# Altium PCB JacdacMotionDetection 54.PcbDoc
Units mm, origin at the board's own origin, x right, y up, seen from the top; angles counter-clockwise.
Board outline 19.46 x 23.8 mm, 2 copper layers (Top Layer, Bottom Layer), stack 1.525 mm thick; 22 components, 9 nets, 67 pads, 11 vias.
Unrouted connection lines stored in the file: 10.
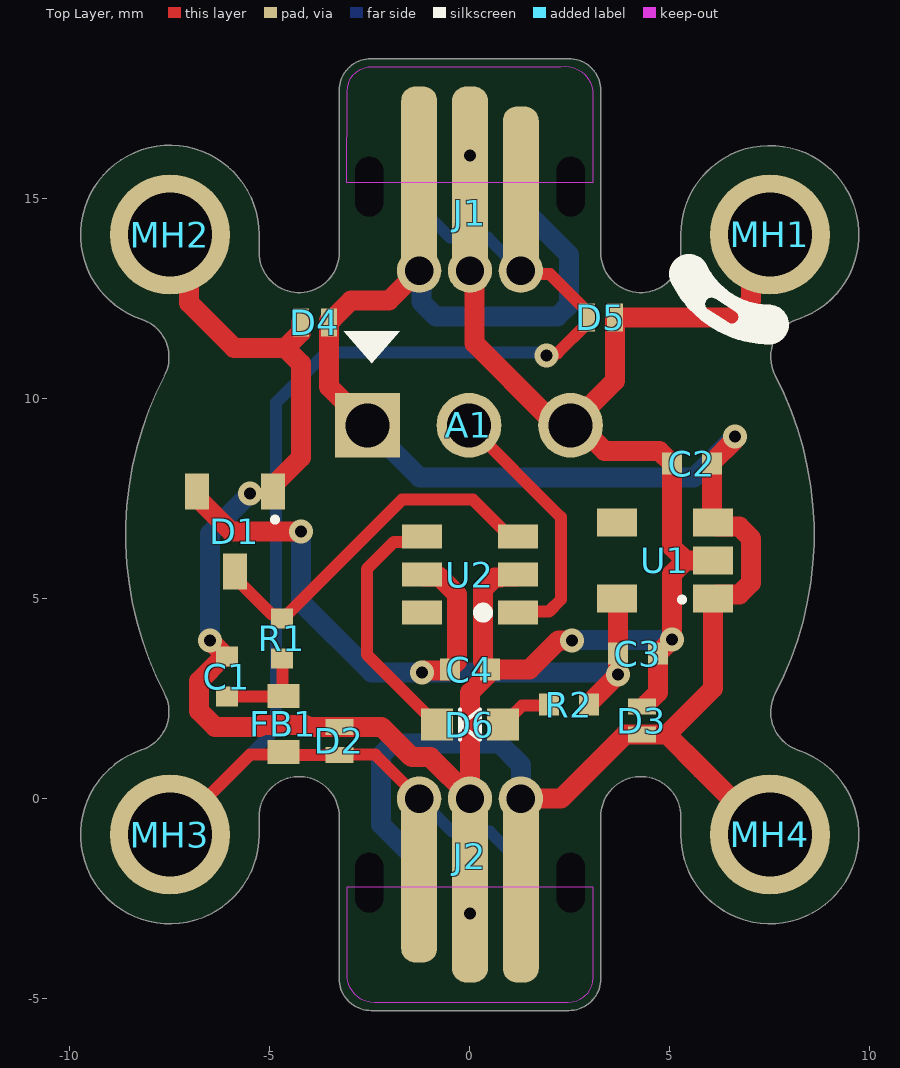
[diagram p0: Top Layer view]
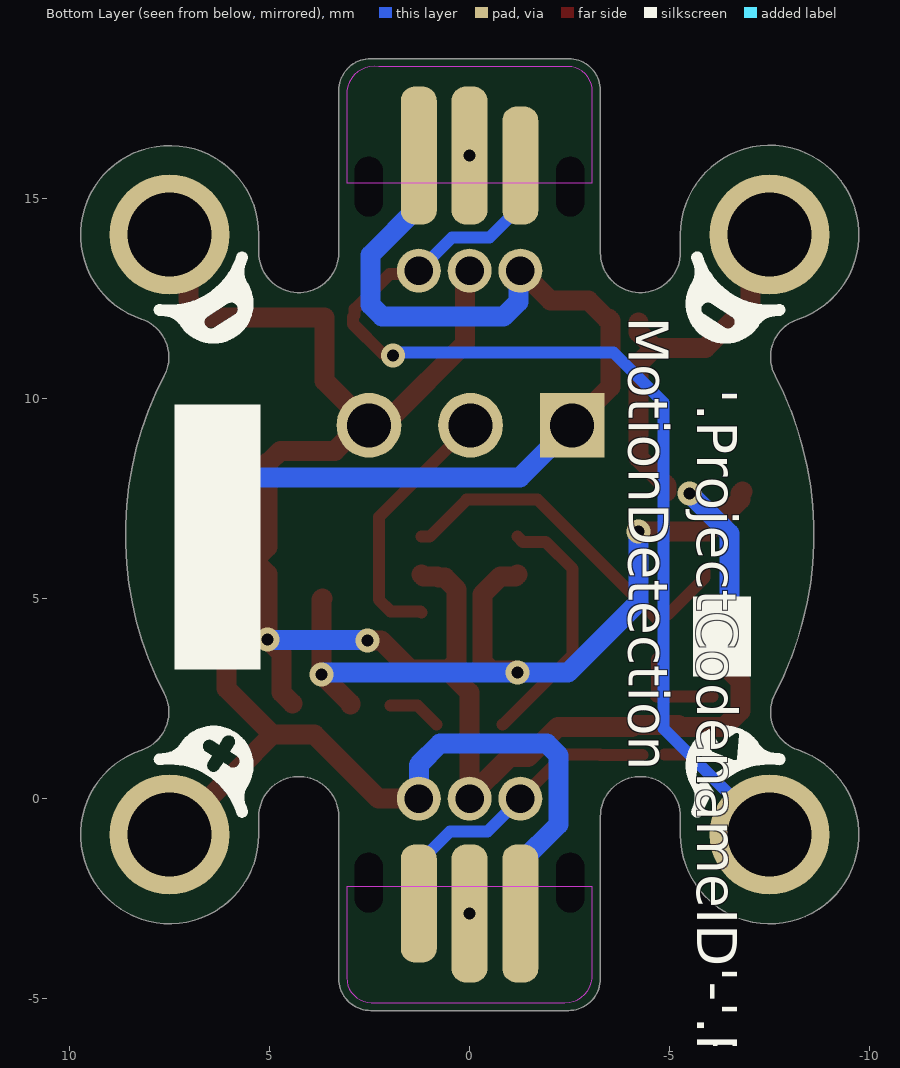
[diagram p1: Bottom Layer view, seen from below]
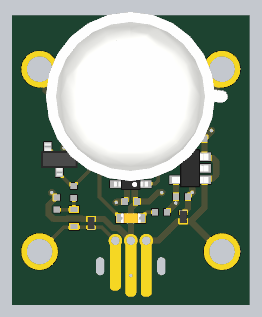
[diagram p2: 3D render of the assembled board from above, using the file's embedded part models]

## Layer stack, top to bottom
Top Solder: solder mask 0.0102, Solder Resist, Dk 3.5
Top Layer: signal copper 0.0356
Dielectric 1: core 1.454, FR-4, Dk 4.2
Bottom Layer: signal copper 0.0356
Bottom Solder: solder mask 0.0102, Solder Resist, Dk 3.5

## Board outline
-8.209,1.218 ccw(c-7.503,-0.9) -5.27,-0.9 -5.27,-0.45 cw(c-4.27,-0.45) -3.27,-0.45 -3.27,-4.5 ccw(c-2.471,-4.501) -2.47,-5.3 2.47,-5.3 ccw(c2.471,-4.501) 3.27,-4.5 3.27,-0.45 cw(c4.27,-0.45) 5.27,-0.45 5.27,-0.9 ccw(c7.497,-0.9) 8.201,1.213 cw(c8.517,2.162) 7.63,2.624 ccw(c-0.003,6.6) 7.63,10.576 cw(c8.517,11.038) 8.201,11.987 ccw(c7.497,14.1) 5.27,14.1 5.27,13.65 cw(c4.27,13.65) 3.27,13.65 3.27,17.7 ccw(c2.471,17.701) 2.47,18.5 -2.47,18.5 ccw(c-2.471,17.701) -3.27,17.7 -3.27,13.65 cw(c-4.27,13.65) -5.27,13.65 -5.27,14.1 ccw(c-7.503,14.1) -8.209,11.982 cw(c-8.525,11.033) -7.638,10.572 ccw(c-0.003,6.6) -7.638,2.628 cw(c-8.525,2.167)

## Design rules (kind name [scope] priority, off if disabled: settings)
AssemblyTestPointUsage [All] p1: valid=2
BoardOutlineClearance [All] p1: gap=0.3 ignorepadtopadclearanceinfootprint=FALSE except(0: Arc-SplitContinuation Track-SplitContinuation SMDPad-SplitContinuation THPad-SplitContinuation Via-SplitContinuation Fill-SplitContinuation Poly-SplitContinuation Region-OutlineEdge Region-SplitContinuation Text-OutlineEdge Text-SplitContinuation; 0.2: Track-OutlineEdge Fill-CavityEdge Fill-CutoutEdge Fill-SplitBarrior Poly-CavityEdge Poly-CutoutEdge Poly-SplitBarrior Text-CavityEdge Text-CutoutEdge Text-SplitBarrior; 0.25: SMDPad-OutlineEdge)
Clearance [All] p1: gap=0.125 ignorepadtopadclearanceinfootprint=FALSE except(0: Arc-Hole Track-Hole SMDPad-Hole THPad-Hole Via-Hole Fill-Hole Poly-Hole Region-Hole Text-Hole)
ComponentClearance [All] p1: gap=0.1 collisioncheckmode=3 verticalgap=0.254 showdistances=FALSE
DiffPairsRouting [All] p1: maxlimit=2 minlimit=0.15 mostfreqgap=0.15 toplayer_minwidth=0.15 toplayer_maxwidth=2 toplayer_prefwidth=0.15 bottomlayer_minwidth=0.15 bottomlayer_maxwidth=2 bottomlayer_prefwidth=0.15 substack1={CB9D278B-8BF5-444A-AAF4-837A2A9DF42D} toplayer_{cb9d278b-8bf5-444a-aaf4-837a2a9df42d}_minwidth=0.381 toplayer_{cb9d278b-8bf5-444a-aaf4-837a2a9df42d}_maxwidth=0.381 toplayer_{cb9d278b-8bf5-444a-aaf4-837a2a9df42d}_prefwidth=0.381 bottomlayer_{cb9d278b-8bf5-444a-aaf4-837a2a9df42d}_minwidth=0.381 bottomlayer_{cb9d278b-8bf5-444a-aaf4-837a2a9df42d}_maxwidth=0.381 bottomlayer_{cb9d278b-8bf5-444a-aaf4-837a2a9df42d}_prefwidth=0.381 substack2={826B8647-A721-4255-895A-19F9591B9CD1} toplayer_{826b8647-a721-4255-895a-19f9591b9cd1}_minwidth=0.381 toplayer_{826b8647-a721-4255-895a-19f9591b9cd1}_maxwidth=0.381 toplayer_{826b8647-a721-4255-895a-19f9591b9cd1}_prefwidth=0.381 bottomlayer_{826b8647-a721-4255-895a-19f9591b9cd1}_minwidth=0.381 bottomlayer_{826b8647-a721-4255-895a-19f9591b9cd1}_maxwidth=0.381 bottomlayer_{826b8647-a721-4255-895a-19f9591b9cd1}_prefwidth=0.381 substack3={E64FCAF4-1BC8-437D-B1E0-0E5F2DC0F59E} toplayer_{e64fcaf4-1bc8-437d-b1e0-0e5f2dc0f59e}_minwidth=0.381 toplayer_{e64fcaf4-1bc8-437d-b1e0-0e5f2dc0f59e}_maxwidth=0.381 toplayer_{e64fcaf4-1bc8-437d-b1e0-0e5f2dc0f59e}_prefwidth=0.381 bottomlayer_{e64fcaf4-1bc8-437d-b1e0-0e5f2dc0f59e}_minwidth=0.381 bottomlayer_{e64fcaf4-1bc8-437d-b1e0-0e5f2dc0f59e}_maxwidth=0.381 bottomlayer_{e64fcaf4-1bc8-437d-b1e0-0e5f2dc0f59e}_prefwidth=0.381 substack4={E61CE66C-507C-4E1E-8E83-C905434AFC1C} toplayer_{e61ce66c-507c-4e1e-8e83-c905434afc1c}_minwidth=0.381 toplayer_{e61ce66c-507c-4e1e-8e83-c905434afc1c}_maxwidth=0.381 toplayer_{e61ce66c-507c-4e1e-8e83-c905434afc1c}_prefwidth=0.381 bottomlayer_{e61ce66c-507c-4e1e-8e83-c905434afc1c}_minwidth=0.381 bottomlayer_{e61ce66c-507c-4e1e-8e83-c905434afc1c}_maxwidth=0.381 bottomlayer_{e61ce66c-507c-4e1e-8e83-c905434afc1c}_prefwidth=0.381 maxuncoupledlength=25
FabricationTestPointUsage [All] p1: valid=2 allowmultiple=FALSE
HoleSize [All] p1: absolutevalues=TRUE maxlimit=2.54 minlimit=0.2 maxpercent=80.000 minpercent=20.000
MinimumSolderMaskSliver [All] p1: minsoldermaskwidth=0.005
PlaneClearance [All] p1: clearance=0.3
PlaneConnect [All] p1: planeconnectstyle=Relief reliefexpansion=0.5 reliefentries=4 reliefconductorwidth=0.2 reliefairgap=0.3
PolygonConnect "PolygonConnect GND" [isVIA] p1: connectstyle=Relief reliefconductorwidth=0.2 reliefentries=4 polygonreliefangle="90 Angle" airgapwidth=0.2
PolygonConnect [All] p2: connectstyle=Relief reliefconductorwidth=0.2 reliefentries=4 polygonreliefangle="90 Angle" airgapwidth=0.2
RoutingVias [All] p1: holewidth=0.3 width=0.6 viastyle="Through Hole" minholewidth=0.3 minwidth=0.6 maxholewidth=0.5 maxwidth=0.8
SilkToSilkClearance [All] p1: silktosilkclearance=0.001
SilkToSolderMaskClearance [IsPad] p1: minsilkscreentomaskgap=0.05 clearancetoexposedcopper=TRUE
SolderMaskExpansion [All] p1: expansion=0.075 istentingtop=FALSE
Width [All] p1: maxlimit=2 minlimit=0.15 preferedwidth=0.15 substack1={CB9D278B-8BF5-444A-AAF4-837A2A9DF42D} substack2={826B8647-A721-4255-895A-19F9591B9CD1} substack3={E64FCAF4-1BC8-437D-B1E0-0E5F2DC0F59E} substack4={E61CE66C-507C-4E1E-8E83-C905434AFC1C} minimp=50.000000 maximp=50.000000 favimp=50.000000
20 further rules are at their usual default settings.

## Components (designator, comment, footprint, x,y, rotation, side; value= is the part's Value field where it differs from the comment)
A1 "AM312" AM312 -0.025,9.333 r90 top locked
C1 "CL05C330JB5NNNC" "C0402_0.55MM - without outline" -6.075,3.05 r270 top
C2 "CL05A105KP5NNNC" "C0402_0.55MM - without outline" 5.55,8.375 r0 top
C3 "CL05A105KP5NNNC" "C0402_0.55MM - without outline" 4.2,3.625 r180 top
C4 "CL05A105KP5NNNC" "C0402_0.55MM - without outline" 0,3.225 r180 top
D1 "BAT54S" "NXP-BAT54S-TO-236AB - WITHOUT OUTLINE" -5.875,6.675 r270 top
D2 "RCLAMP0521P-N" "TVS 0402 - L" -3.266,1.443 r90 top
D3 "RCLAMP0521P-N" "TVS 0402 - L" 4.3,1.95 r90 top
D4 "RCLAMP0521P-N" "TVS 0402 - L" -3.875,11.9 r180 top
D5 "RCLAMP0521P-N" "TVS 0402 - L" 3.275,12.025 r0 top
D6 "Everlight Elec'''" "0603 Orange - without outline" 0,1.85 r0 top
FB1 "TDK MPZ1608S102ATA00" "TDK MPZ1608 0.8mm - without outline" -4.664,1.861 r90 top
J1 "3 pin JACDAC edge connector" JACDAC_EDGE_CONNECTOR_NO_TRACES 0,12.65 r0 top
J2 "3 pin JACDAC edge connector" JACDAC_EDGE_CONNECTOR_NO_TRACES 0,0.55 r180 top
MH1 "MH_5.0MMK_3.0MMC_2.1MMD_PTH" MH_5.0MMK_3.0MMC_2.1MMD_PTH 7.5,14.1 r0 top
MH2 "MH_5.0MMK_3.0MMC_2.1MMD_PTH" MH_5.0MMK_3.0MMC_2.1MMD_PTH -7.5,14.1 r180 top
MH3 "MH_5.0MMK_3.0MMC_2.1MMD_PTH" MH_5.0MMK_3.0MMC_2.1MMD_PTH -7.5,-0.9 r180 top
MH4 "MH_5.0MMK_3.0MMC_2.1MMD_PTH" MH_5.0MMK_3.0MMC_2.1MMD_PTH 7.5,-0.9 r0 top
R1 "RC0402FR-07220RL" "R0402 - Without outline" -4.7,4 r270 top
R2 "RC0402FR-071KL" "R0402 - Without outline" 2.475,2.35 r0 top
U1 "LDO 3.3V/300 mA" "ON_SEMI-SOT23-5 - WITHOUT OUTLINE" 4.875,5.95 r180 top
U2 "PMS150C" SOT23-6 0,5.6 r180 top

## Footprints (in the part's own frame and the unit in brackets; to place one, negate y for a bottom-side part, rotate by r counter-clockwise, add the part's x,y. Pads: shape width x height; smd on the part's side, far side on the other; paste and mask are expansions set on the pad)
"0603 Orange - without outline" [mm]
  rect 0.8x0.8 smd paste-0.05: 1(-0.825,0) 2(0.825,0)
  silkscreen extent -0.25,-0.38 0.25,0.38, body extent -0.8,-0.4 0.8,0.4, height 0.54
AM312 [mm] "Mini Pyroelectric PIR Sensor Module Manual Motion Infrared IR Detector"
  rect 1.62x1.62 hole 1.1: 1(0,2.54)
  round 1.62 hole 1.1: 2(0,0) 3(0,-2.54)
  silkscreen extent 1.55,1.73 2.35,3.13, body extent -4.42,-6.95 9.48,6.95, height 21.61
"C0402_0.55MM - without outline" [mm]
  rect 0.5x0.55 smd: 1(-0.5,0) 2(0.5,0)
  body extent -0.5,-0.25 0.5,0.25, height 0.55
JACDAC_EDGE_CONNECTOR_NO_TRACES [mm] "JacDac 3 pin connector with no traces"
  rrect78% 0.9x2.95 smd far side paste-1 mask+0: 1(-1.27,3.175)
  round 1.11 / inner round 0.71 / far side round 1.1 hole 0.71 paste-0.254 mask+0: 1(1.27,0.55) 2(0,0.55) 3(-1.27,0.55)
  rrect78% 0.9x4.3 smd paste-1 mask+0: 1(1.27,2.5)
  rrect78% 0.9x4.8 smd paste-1 mask+0: 2(0,2.75) 3(-1.27,2.75)
  rrect78% 0.9x3.45 smd far side paste-1 mask+0: 2(0,3.425) 3(1.27,3.425)
  round 0 hole 0.7 slot 1.5 at 90 deg unplated: ""(-2.52,2.65) ""(2.52,2.65)
  Top Layer keep-out region: -3.075,2.75 -3.07,5.033 -2.987,5.341 -2.761,5.567 -2.453,5.65 -2.453,5.65 2.27,5.65 2.545,5.635 2.794,5.516 2.978,5.31 3.07,5.05 3.07,5.05 3.07,2.75
  Bottom Layer lines w0.2: -1.27,0.85 -1.126,0.85
  Bottom Layer keep-out region: -3.07,2.75 -3.07,5.033 -3.023,5.269 -2.889,5.469 -2.689,5.603 -2.453,5.65 -2.453,5.65 2.27,5.65 2.545,5.635 2.794,5.516 2.978,5.31 3.07,5.05 3.07,5.05 3.07,2.75
MH_5.0MMK_3.0MMC_2.1MMD_PTH [mm] "Mounting Hole 5.0mm clearance, 3.1 annualar ring and 2.1mm PTH"
  round 3 hole 2.1 mask+0.05: 1(0,0)
"NXP-BAT54S-TO-236AB - WITHOUT OUTLINE" [mm] "SOT23, 3-Leads, Body 2.90x2.30mm, Pitch 0.95mm, IPC Medium Density"
  rect 0.9x0.6 smd: 1(-1,0.95) 2(-1,-0.95) 3(1,0)
  silkscreen extent -0.35,0.95 -0.25,1.05, body extent -1.32,-1.5 1.32,1.5, height 1.12
"ON_SEMI-SOT23-5 - WITHOUT OUTLINE" [mm]
  rect 1x0.7 smd: 1(-1.2,0.95) 2(-1.2,0) 3(-1.2,-0.95) 4(1.2,-0.95) 5(1.2,0.95)
  silkscreen extent -0.48,0.93 -0.38,1.02, body extent -1.5,-1.57 1.5,1.58, height 1.1
"R0402 - Without outline" [mm]
  rect 0.5x0.55 smd: 1(-0.5,0) 2(0.5,0)
  body extent -0.5,-0.25 0.5,0.25, height 0.35
SOT23-6 [mm] "SOT23, 6-Leads, Body 2.90x2.45mm, Pitch 0.95mm, IPC Medium Density"
  rect 1x0.6 smd: 1(-1.2,0.95) 2(-1.2,0) 3(-1.2,-0.95) 4(1.2,-0.95) 5(1.2,0) 6(1.2,0.95)
  silkscreen extent -0.43,0.85 -0.23,1.05, body extent -1.4,-1.45 1.4,1.45, height 1.45
"TDK MPZ1608 0.8mm - without outline" [mm]
  rect 0.6x0.8 smd paste-0.1: 1(-0.7,0) 2(0.7,0)
  body extent -0.8,-0.4 0.8,0.4, height 0.8
"TVS 0402 - L" [mm] "TVS 0402 RoHS"
  rect 0.4x0.7 smd paste-0.038 mask+0.05: 1(-0.35,0) 2(0.35,0)
  body extent -0.5,-0.3 0.5,0.3, height 0.5

## Part data
A1: "Low Power Ultra-Miniature PIR Sensor", Case/Package=Module, Max Operating Temperature=60°C, Min Operating Temperature=-20°C, Supplier Part Number 1=1528-1991-ND, ComponentLink1Description="Online datasheet", ComponentLink1URL=http://www.image.micros.com.pl/_dane_techniczne_auto/cz%20am312.pdf, Descr="PIR (MOTION) SENSOR", Manufacturer Part Number=AM312, Output Type=Digital, Pricing 2="1=9.95000, 10=9.95000, 50=9.95000, 100=9.95000, 1000=9.95000, 10000=9.95000 (USD)", Pricing 3="1=11.13000 (USD)", Pricing 4="1=9.95000 (USD)", Rays Vector=IR, Sensing Method="Infrared (IR)", Stock 2=117, Stock 3=85, Stock 4=1, Supplier 2=Mouser, Supplier 3="Arrow Electronics", Supplier 4="Allied Electronics", Supplier Part Number 2=485-189, Supplier Part Number 3=189, Supplier Part Number 4=70928194
C1: "CAP CER 33PF 50V C0G/NP0 0402", Capacitance=33pF, Case Code (Imperial)=0402, Case Code (Metric)=1005, Dielectric=C0G, Manufacturer=Samsung, Max Operating Temperature=125°C, Min Operating Temperature=-55°C, Package Quantity=1, Supplier Part Number 1=1276-1272-1-ND, Temperature Coefficient=300ppm/°C, Tolerance=5%, Voltage=50V, Case/Package=0402, Category="Ceramic Capacitors", ComponentLink1Description="Online datasheet", ComponentLink1URL=https://datasheet.ciiva.com/15195/getdatasheetpartid-355282-15195687.pdf, Construction=Flat, Contact Plating=Tin, Depth=0.5mm, Height=0.5mm, Lead Free="Lead Free", Length=1mm, Manufacturer Part Number=CL05C330JB5NNNC, Material=Ceramic, Mount="Surface Mount", Packaging="Tape and Reel", Pricing 1="1=0.10000, 10=0.02300, 50=0.01260, 100=0.01040, 500=0.00740, 1000=0.00582, 2500=0.00529, 5000=0.00487 (USD)", Pricing 2="1=0.12500, 25=0.02900, 100=0.01300, 250=0.01100, 500=0.00900, 1000=0.00600 (USD)", Pricing 3="1=0.10000, 10=0.01400, 50=0.01400, 100=0.01100, 1000=0.00600, 10000=0.00400 (USD)", Pricing 4="150=0.01120, 500=0.00860, 2500=0.00640, 5000=0.00550 (GBP)", Radiation Hardening=No, RoHS=Yes, RoHS Compliant=Yes, Series=CL, Stock 1=5436088, Stock 2=45340, Stock 3=8877, Stock 4=10934, Supplier 1=Digi-Key, Supplier 2=Newark, Supplier 3=Mouser, Supplier 4=Farnell, Supplier Part Number 2=82AC9259, Supplier Part Number 3=187-CL05C330JB5NNNC, Supplier Part Number 4=3013373RL, Thickness=0.022inch, Voltage Rating=50V, Voltage Rating (DC)=50V, Width=0.02inch
C2 C3 C4: "CAP CER 1UF 10V X5R 0402", Capacitance=1µF, Case Code (Imperial)=0402, Case Code (Metric)=1005, Dielectric=X5R, Manufacturer=Samsung, Max Operating Temperature=85°C, Min Operating Temperature=-55°C, Package Quantity=1, Supplier Part Number 1=1276-1076-1-ND, Tolerance=10%, Voltage Rating=10V, Case/Package=0402, Category=Capacitors, Checked=?, ComponentLink1Description="Online datasheet", ComponentLink1URL=https://datasheet.ciiva.com/15195/getdatasheetpartid-358390-15195630.pdf, Contact Plating=Tin, Created=DG, Depth=0.5mm, Height=0.5mm, Length=1mm, Manufacturer Part Number=CL05A105KP5NNNC, Material=Ceramic, Mount="Surface Mount", Packaging="Tape and Reel", Pricing 1="1=0.10000, 10=0.03900, 50=0.02100, 100=0.01720, 500=0.01228, 1000=0.00965, 2500=0.00877, 5000=0.00807 (USD)", Pricing 2="1=0.10000, 10=0.04200, 100=0.01800, 500=0.01300, 1000=0.01000, 2500=0.00900 (USD)", Pricing 3="10=0.02450, 100=0.02000, 500=0.01310, 2500=0.00920, 5000=0.00810, 10000=0.00640, 50000=0.00490 (GBP)", Radiation Hardening=No, RoHS=Yes, Stock 1=5705569, Stock 2=928941, Stock 3=53670, Supplier 1=Digi-Key, Supplier 2=Mouser, Supplier 3=Farnell, Supplier Part Number 2=187-CL05A105KP5NNNC, Supplier Part Number 3=3013329, Thickness=0.022inch, Width=0.02inch
D1: "DIODE ARRAY SCHOTTKY 30V SOT23", Manufacturer=Nexperia, Manufacturer Part Number=BAT54S,235, Supplier Part Number 1=1727-1868-1-ND, Category="Rectifier Diodes", ComponentLink1Description="NXP datasheet online", ComponentLink1URL=https://assets.nexperia.com/documents/data-sheet/BAT54_SER.pdf, Pricing 1="1=0.13000, 10=0.11900, 100=0.05610, 500=0.03326, 1000=0.02185, 5000=0.02138 (USD)", RoHS=No, Stock 1=14011, Supplier 1=Digi-Key, Supplier 2=Mouser, Supplier 3=RSComponents, Supplier Part Number 2=771-BAT54S235, Supplier Part Number 3=1707990
D2 D3 D4 D5: "Bidirectional 5V (Max) 6V 16V 3.5A (8/20us) 0402 TVS RoHS", Manufacturer="Born Semiconductor", Package=0402, Supplier1 Part Number=C316043, Checked By=?, ComponentLink1Description="Online datasheet", ComponentLink1URL=https://datasheet.lcsc.com/szlcsc/Bourne-Semicon-Shenzhen-RCLAMP0521P-N_C316043.pdf, Created By="D Gakure", Manufacturer Part Number=RCLAMP0521P-N, Supplier1=LCSC
D6: library part 19-217/S2C-AQ1R1B/3T, "LED ORANGE DIFFUSED 1608 SMD", Case Code (Imperial)=0603, Case Code (Metric)=1608, Color=Orange, Forward Voltage=2.05V, Lens Color=White, Manufacturer="Everlight Elec", Supplier 1 Part Number=C146215, Test Current=25mA, Case/Package=0603, Category=LEDs, Colour=Orange, ComponentLink1Description="Online datasheet", ComponentLink1URL=https://datasheet.lcsc.com/lcsc/1912171731_Everlight-Elec-19-217-S2C-AQ1R1B-3T_C146215.pdf, Dominant Wavelength=605nm, Height=0.65mm, Lead Free="Lead Free", Length=1.6mm, Lens Transparency=Diffused, Luminous Intensity=100mcd, Manufacturer Part Number=19-217/S2C-AQ1R1B/3T, Mount="Surface Mount", RoHS=Yes, Supplier 1=LCSC, Width=0.8mm
FB1: "0603 1k@100MHz 0.8A chip", Case Code (Imperial)=0603, Case Code (Metric)=1608, Current Rating=800mA, DC Resistance (DCR)=300mR, Manufacturer=TDK, Manufacturer Part Number=MPZ1608S102ATA00, Package Quantity=4000, Supplier Part Number 1=445-8694-1-ND, Tolerance=25%, Case/Package=0603, ComponentLink2Description="datasheet online", ComponentLink2URL=https://www.mouser.co.uk/datasheet/2/400/eads_commercial_power_mpz1608_en-923650.pdf, ComponentLink3Description=datasheet, ComponentLink3URL="Y:\System\Altium\Libraries 2014\TDK\Datasheets\eads_commercial_power_mpz1608_en-923650.pdf", Core Material=Ferrite, Height=0.037inch, Impedance="1kR @ 100MHz", Length=0.063inch, Max DC Current=800mA, Mount="Surface Mount", Packaging="Tape and Reel", Pricing 1="1=0.1, 10=0.079, 25=0.0716, 50=0.0644, 100=0.0472, 250=0.03432, 500=0.03146, 1000=0.02717 (USD)", Stock 1=113542, Supplier 1=Digi-Key, Supplier 2=Mouser, Supplier Part Number 2=810-MPZ1608S102ATA00, Width=0.031inch
J1 J2: library part "Jacdac edge connector", "3 pin Jacdac edge connector 1.27mm pitch", Manufacturer Part Number=JACDAC_EDGE_CONNECTOR, Checked By=?, ComponentLink1Description="Yuliang JACDAC cable connector drawing online", ComponentLink1URL=https://github.com/microsoft/jacdac-mdk/blob/main/connector/JACDAC-Connector-by-Yuliang-2020-11-28.pdf, ComponentLink2Description="JACDAC PCB edge connector spec onlin", ComponentLink2URL=https://github.com/microsoft/jacdac-mdk/blob/main/connector/JACDAC_PCB_Edge_Connector_Drawing_JD-PEC-01_rev_01.pdf, Created By="D. Gakure", PCB Type="1.6mm FR4"
MH1 MH2 MH3 MH4: "Mounting Hole 5.0mm keepout, 3.0mm annualar ring and 2.1mm Drill PTH"
R1: "RES SMD 220 OHM 1% 1/16W 0402", Case Code (Imperial)=0402, Case Code (Metric)=1005, Manufacturer=Yageo, Max Operating Temperature=155°C, Max Power Dissipation=63mW, Min Operating Temperature=-55°C, Package Quantity=1, Power Rating=62.5mW, Resistance=220R, Resistor Type="Thick Film", Supplier Part Number 1=311-220LRCT-ND, Temperature Coefficient=100ppm/°C, Tolerance=1%, Voltage Rating=50V, Case/Package=0402, Category=Resistors, Checked=?, ComponentLink1Description="Online datasheet", ComponentLink1URL=https://datasheet.ciiva.com/11819/0900766b80c66297-11819466.pdf, Created=D.G, Depth=0.5mm, Features="Moisture Resistant", Height=0.016inch, Lead Free="Lead Free", Length=1mm, Manufacturer Part Number=RC0402FR-07220RL, Military Standard=Not, Number of Pins=2, Number of Terminations=2, Packaging="Tape and Reel", Pricing 1="1=0.10000, 10=0.01400, 100=0.00580, 1000=0.00262, 2500=0.00228, 5000=0.00188 (USD)", Pricing 2="1=0.10000, 10=0.01200, 100=0.00400, 1000=0.00400, 2500=0.00400, 10000=0.00300 (USD)", Pricing 3="1=0.08130, 25=0.01210, 100=0.01120, 250=0.01030, 500=0.00900 (GBP)", REACH SVHC="No SVHC", RoHS=Yes, Stock 1=1286042, Stock 2=324625, Stock 3=18234, Supplier 1=Digi-Key, Supplier 2=Mouser, Supplier 3=Farnell, Supplier Part Number 2=603-RC0402FR-07220RL, Supplier Part Number 3=2147864, Termination=SMD/SMT, Voltage Rating (DC)=50V, Width=0.02inch
R2: "RES SMD 1K OHM 1% 1/16W 0402", Case Code (Imperial)=0402, Case Code (Metric)=1005, Manufacturer=Yageo, Max Operating Temperature=155°C, Min Operating Temperature=-55°C, Power Rating=62.5mW, Resistance=1kR, Resistor Type="Thick Film", Supplier Part Number 1=311-1.00KLRDKR-ND, Temperature Coefficient=100ppm/°C, Tolerance=1%, Voltage Rating=50V, Case/Package=0402, Category=Resistors, Checked=?, ComponentLink2Description="Online datasheet", ComponentLink2URL=https://datasheet.ciiva.com/12666/pyu-rc0402-51-rohs-l-6-r-12666741.pdf, Created=D.G, Depth=0.5mm, Height=0.32mm, Lead Free="Lead Free", Length=1mm, Manufacturer Part Number=RC0402FR-071KL, Military Standard=Not, Number of Pins=2, Packaging="Tape and Reel", Pricing 1="1=0.10000, 10=0.01400, 100=0.00580, 1000=0.00262, 2500=0.00228, 5000=0.00188 (USD)", Pricing 2="1=0.10000, 10=0.01200, 100=0.00400, 1000=0.00400, 2500=0.00400, 10000=0.00300 (USD)", Pricing 3="1=0.08130, 25=0.01210, 100=0.01120, 250=0.01030, 500=0.00900 (GBP)", REACH SVHC=Unknown, RoHS=Yes, Stock 1=37591306, Stock 2=11912978, Stock 3=29900, Supplier 1=Digi-Key, Supplier 2=Mouser, Supplier 3=Farnell, Supplier Part Number 2=603-RC0402FR-071KL, Supplier Part Number 3=2132441, Termination=SMD/SMT, Voltage Rating (DC)=50V, Width=0.5mm
U1: library part NCP114ASN330T1G, "ON SEMICONDUCTOR - NCP114ASN330T1G - LDO Voltage Regulator, Fixed, 1.7 V to 5.5 V in, 3.3 V/300 mA out, 150 mV drop, TSOP-5", Case/Package=SOT-23-5, Dropout Voltage=225mV, Manufacturer="ON Semiconductor", Max Input Voltage=5.5V, Max Operating Temperature=85°C, Min Operating Temperature=-40°C, Min Output Voltage=3.3V, Output Current=300mA, Power Supply Rejection Ratio (PSRR)=75dB, Quiescent Current=95uA, Supplier Part Number 1=NCP114ASN330T1GOSCT-ND, Category="Voltage Regulators - Linear", Checked=?, ComponentLink3Description="On Semi datasheet online", ComponentLink3URL=http://www.onsemi.com/pub/Collateral/NCP114-D.PDF, Created=DG, Lead Free="Lead Free", Manufacturer Part Number=NCP114ASN330T1G, Mount="Surface Mount", Number of Regulators=1, Output Configuration=Positive, Output Type=Fixed, Packaging="Cut Tape", Pricing 1="1=0.33000, 10=0.24900, 25=0.21760, 100=0.12440, 250=0.11664, 500=0.09330, 1000=0.07153 (USD)", RoHS=No, Stock 1=32529, Supplier 1=Digi-Key, Supplier 2=RSComponents, Supplier 3=Mouser, Supplier Part Number 2=1263178, Supplier Part Number 3=863-NCP114ASN330T1G
U2: "8bit OTP Type IO Controller", Manufacturer=PADAUK, Manufacturer Part Number=PMS150C-U6, Package=SOT-23-6, Supplier Part Number 1=C168658, ComponentLink1Description="Padauk datasheet online", ComponentLink1URL=http://www.padauk.com.tw/upload/doc/PMS15A,PMS150C%20datasheet%20V108_EN_20200724.pdf, Pricing 1="1=0.6, 10=0.0595, 100=0.0449", Stock 1=0, Supplier 1=LCSC, Supplier Order Qty 1=3000

## Via types
v1: diameter 0.6, hole 0.3, Top Layer to Bottom Layer, tented both sides, 11 vias

## Nets (pads, with @x,y where several pads share a name; then routed paths per layer and width w, separated by ;. In a path a pad name is that pad's centre, name@x,y a point inside that pad or via, vN(x,y) a via of type N, cw(c..) or ccw(c..) an arc to the next point about the centre after c; other vN are vias at no path point)
3V3: C3.2 C4.2 D1.2 R2.2 U1.5 U2.5 | length 20.3
  Top Layer w0.5: D1.2 -6.775,7.625 -6.775,7.475 -5.975,6.675 v1(-4.225,6.675) ; v1(-1.2,3.15) -1.173,3.15 -1.123,3.2 -0.5,3.2 C4.2 ; U2.5 -1.15,5.55 -0.77,5.55 -0.325,5.105 -0.325,3.425 C4.2@-0.5,3.25 ; R2.2 2.975,2.375 v1(3.7,3.1) C3.2 3.7,4.975 U1.5
  Bottom Layer w0.5: v1(-4.225,6.675) -4.225,4.911 -2.464,3.15 v1(-1.2,3.15) 3.623,3.15 3.673,3.1 v1(3.7,3.1)
GND: A1.3 C1.1 C2.1 C3.1 C4.1 D1.1 D2.2 D3.2 D4.2 D5.2 J1.2 J2.2 MH1.1 MH2.1 U1.2 U2.2 | length 58.9
  Top Layer w0.5: MH2.1 -7.023,13.623 -7.023,12.395 -5.894,11.265 -4.617,11.265 ; v1(-6.5,3.95) C1.1@-6.1,3.55 ; C1.1 -6.162,3.55 -6.775,2.937 -6.775,2.195 -6.374,1.793 -5.262,1.793 -5.22,1.836 -4.109,1.836 -4.067,1.793 -2.213,1.793 -1.456,1.036 -0.991,1.036 J2.2@0,0.045 ; D1.1 -4.925,7.825 -4.875,7.875 -4.225,8.525 -4.225,10.873 -4.617,11.265 ; D4.2 -4.225,11.657 -4.617,11.265 ; J2.2@0,0 J2.2@0,0.045 ; J1.2@0,13.2 0.117,13.083 0.117,11.376 1.946,9.547 2.301,9.547 A1.3 ; U2.2 1.15,5.55 0.796,5.55 0.771,5.525 0.618,5.525 0.325,5.232 0.325,3.425 0.5,3.25 C4.1 ; v1(2.545,3.95) 2.208,3.95 1.483,3.225 C4.1 ; D3.2@4.425,2.375 4.7,2.65 C3.1 4.7,3.65 4.725,3.65 v1(5.05,3.975) 5.05,5.609 5.391,5.95 ; U1.2 5.391,5.95 ; MH1.1 7.025,13.625 7.025,12.45 6.6,12.025 D5.2 3.625,10.443 A1.3 ; J2.2@0,0.045 0,2.654 0.5,3.154 C4.1 ; A1.3 2.727,9.333 3.368,8.692 4.733,8.692 5.025,8.4 5.05,8.4 5.05,6.291 5.391,5.95
  Bottom Layer w0.5: v1(-6.5,3.95) -6.5,6.625 v1(-5.5,7.625) ; v1(2.545,3.95) 2.558,3.963 5.038,3.963 v1(5.05,3.975)
  other v1: 0,-2.875 0,16.075
JD_DATA: D2.1 D5.1 FB1.1 J1.1 J2.1 MH3.1 | length 38.2
  Top Layer w0.3: MH3.1 -5.5,1.1 FB1.1@-4.875,1.1 ; FB1.1@-4.318,1.093 D2.1 ; D2.1@-3.262,1.098 -2.368,1.098 J2.1@-1.27,0 ; J1.1@1.27,13.2 1.361,13.109 2.001,13.109 2.875,12.235 2.875,12.085 D5.1@2.915,12.045 ; v1(1.908,11.075) 1.966,11.132 2.182,11.132 2.915,11.865 D5.1@2.915,11.97
  Bottom Layer w0.3: MH3.1 -4.85,1.75 -4.85,9.9 -3.6,11.15 v1@1.908,11.15 ; J2.1@-1.27,0 -0.445,-0.825 0.495,-0.825 1.27,-1.6 J2.1@1.27,-2.625 ; J1.1@-1.27,15.825 -1.27,14.8 -0.495,14.025 0.445,14.025 J1.1@1.27,13.2
JD_DATA_MCU: D1.3 R1.1 U2.3 | length 9.3
  Top Layer w0.3: D1.3 -5.875,5.525 -4.95,4.6 -4.8,4.6 R1.1 -4.675,4.5 -1.7,7.475 0.075,7.475 1,6.55 U2.3
JD_PWR: A1.1 C2.2 D3.1 D4.1 J1.3 J2.3 MH4.1 U1.1 U1.3 | length 52.2
  Top Layer w0.5: A1.1@-2.025,9.873 -2.565,9.333 -3.525,10.293 D4.1 -3.525,11.95 -3.475,12 -3.425,12 -2.975,12.45 -2.025,12.45 -1.275,13.2 J1.3@-1.27,13.2 ; J2.3@1.27,0 2.281,0 3.881,1.6 D3.1 4.925,1.6 ; v1(6.625,9.05) 6.606,9.031 6.606,8.956 6.05,8.4 C2.2 6.05,6.925 6.175,6.8 6.732,6.8 7.025,6.507 7.025,5.393 6.732,5.1 6.175,5.1 U1.1 6.075,2.75 4.925,1.6 ; MH4.1@7.425,-0.9 5.792,0.733 4.925,1.6
  Bottom Layer w0.5: A1.1@-2.565,9.333 -1.257,8.025 5.6,8.025 v1(6.625,9.05) ; J2.3@-1.27,-2.875 -1.27,-1.6 -2.225,-0.645 -2.225,1.082 -1.932,1.375 0.738,1.375 1.27,0.843 J2.3@1.27,0 ; J1.3@-1.27,13.2 -1.218,13.148 -1.218,12.414 -0.854,12.05 2.185,12.05 2.478,12.343 2.478,13.592 1.27,14.8 J1.3@1.27,16.075
JD_STATUS: D6.1 U2.4 | length 6.3
  Top Layer w0.3: U2.4 -1.334,6.416 -1.903,6.416 -2.575,5.744 -2.575,3.6 D6.1
NetC1_2: C1.2 FB1.2 R1.2 | length 2.4
  Top Layer w0.3: C1.2 -6.07,2.555 -4.67,2.555 FB1.2 -4.682,2.578 -4.682,3.482 R1.2
NetD6_2: D6.2 R2.1 | length 1.3
  Top Layer w0.3: D6.2 1.3,2.325 R2.1@1.975,2.325
PIR_MOTION: A1.2 U2.1 | length 6.5
  Top Layer w0.3: A1.2 2.27,7.038 2.27,4.974 1.974,4.679 1.229,4.679 U2.1
pads on no net: J1. J2. U1.4 U2.6

## Other copper
Top Layer:
Bottom Layer:

## Silkscreen, mask and mechanical layers (free items; w line width, h text height)
Top Overlay:
  region: 187 vertices and 1 holes, not listed, extent 4.982,11.357 7.968,13.613
Bottom Overlay:
  drawing of 6 lines, arcs and shapes, not listed
  text "MotionDetection" at -3.975,12.046 h1 r90
  text "'.ProjectCodenameID'-'.ProjectRevision'" at -5.696,10.248 h1 r90
Top Paste:
Bottom Paste:
Top Solder:
Bottom Solder:
Dimension:
  lines w0.05: -8.209,1.218 ccw(c-8.525,2.167) -7.638,2.628 ; -8.209,1.218 ccw(c-7.503,-0.9) -5.27,-0.9 ; -8.209,1.218 ccw(c-8.525,2.167) -7.638,2.628 ; -8.209,1.218 ccw(c-7.503,-0.9) -5.27,-0.9 ; -8.209,11.982 cw(c-7.503,14.1) -5.27,14.1 ; -8.209,11.982 cw(c-8.525,11.033) -7.638,10.572 ; -8.209,11.982 cw(c-7.503,14.1) -5.27,14.1 ; -8.209,11.982 cw(c-8.525,11.033) -7.638,10.572 ; -7.638,2.628 cw(c-0.003,6.6) -7.638,10.572 ; -7.638,2.628 cw(c-0.003,6.6) -7.638,10.572 ; -5.27,-0.9 -5.27,-0.45 ; -5.27,-0.9 -5.27,-0.45 ; -5.27,-0.45 cw(c-4.27,-0.45) -3.27,-0.45 ; -5.27,-0.45 cw(c-4.27,-0.45) -3.27,-0.45 ; -5.27,13.65 ccw(c-4.27,13.65) -3.27,13.65 ; -5.27,13.65 ccw(c-4.27,13.65) -3.27,13.65 ; -5.27,13.65 -5.27,14.1 ; -5.27,13.65 -5.27,14.1 ; -3.27,-4.5 ccw(c-2.471,-4.501) -2.47,-5.3 ; -3.27,-4.5 ccw(c-2.471,-4.501) -2.47,-5.3 ; -3.27,-4.5 -3.27,-0.45 ; -3.27,-4.5 -3.27,-0.45 ; -3.27,13.65 -3.27,17.7 ; -3.27,13.65 -3.27,17.7 ; -3.27,17.7 cw(c-2.471,17.701) -2.47,18.5 ; -3.27,17.7 cw(c-2.471,17.701) -2.47,18.5 ; -2.47,-5.3 2.47,-5.3 ; -2.47,-5.3 2.47,-5.3 ; -2.47,18.5 2.47,18.5 ; -2.47,18.5 2.47,18.5 ; 2.47,-5.3 ccw(c2.471,-4.501) 3.27,-4.5 ; 2.47,-5.3 ccw(c2.471,-4.501) 3.27,-4.5 ; 2.47,18.5 cw(c2.471,17.701) 3.27,17.7 ; 2.47,18.5 cw(c2.471,17.701) 3.27,17.7 ; 3.27,-4.5 3.27,-0.45 ; 3.27,-4.5 3.27,-0.45 ; 3.27,-0.45 cw(c4.27,-0.45) 5.27,-0.45 ; 3.27,-0.45 cw(c4.27,-0.45) 5.27,-0.45 ; 3.27,13.65 ccw(c4.27,13.65) 5.27,13.65 ; 3.27,13.65 ccw(c4.27,13.65) 5.27,13.65 ; 3.27,13.65 3.27,17.7 ; 3.27,13.65 3.27,17.7 ; 5.27,-0.9 ccw(c7.497,-0.9) 8.201,1.213 ; 5.27,-0.9 ccw(c7.497,-0.9) 8.201,1.213 ; 5.27,-0.9 5.27,-0.45 ; 5.27,-0.9 5.27,-0.45 ; 5.27,13.65 5.27,14.1 ; 5.27,13.65 5.27,14.1 ; 5.27,14.1 cw(c7.497,14.1) 8.201,11.987 ; 5.27,14.1 cw(c7.497,14.1) 8.201,11.987 ; 7.63,2.624 ccw(c8.517,2.162) 8.201,1.213 ; 7.63,2.624 ccw(c-0.003,6.6) 7.63,10.576 ; 7.63,2.624 ccw(c8.517,2.162) 8.201,1.213 ; 7.63,2.624 ccw(c-0.003,6.6) 7.63,10.576 ; 7.63,10.576 cw(c8.517,11.038) 8.201,11.987 ; 7.63,10.576 cw(c8.517,11.038) 8.201,11.987
Fabrication Notes:
Board Outline:
  lines w0.2: -8.209,1.218 ccw(c-8.525,2.167) -7.638,2.628 ; -8.209,1.218 ccw(c-8.525,2.167) -7.638,2.628 ; -8.209,1.218 ccw(c-7.503,-0.9) -5.27,-0.9 ; -8.209,1.218 ccw(c-7.503,-0.9) -5.27,-0.9 ; -8.209,11.982 cw(c-7.503,14.1) -5.27,14.1 ; -8.209,11.982 cw(c-7.503,14.1) -5.27,14.1 ; -8.209,11.982 cw(c-8.525,11.033) -7.638,10.572 ; -8.209,11.982 cw(c-8.525,11.033) -7.638,10.572 ; -7.638,2.628 cw(c-0.003,6.6) -7.638,10.572 ; -7.638,2.628 cw(c-0.003,6.6) -7.638,10.572 ; -5.27,-0.9 -5.27,-0.45 ; -5.27,-0.9 -5.27,-0.45 ; -5.27,-0.45 cw(c-4.27,-0.45) -3.27,-0.45 ; -5.27,-0.45 cw(c-4.27,-0.45) -3.27,-0.45 ; -5.27,13.65 ccw(c-4.27,13.65) -3.27,13.65 ; -5.27,13.65 ccw(c-4.27,13.65) -3.27,13.65 ; -5.27,13.65 -5.27,14.1 ; -5.27,13.65 -5.27,14.1 ; -3.27,-4.5 ccw(c-2.471,-4.501) -2.47,-5.3 ; -3.27,-4.5 ccw(c-2.471,-4.501) -2.47,-5.3 ; -3.27,-4.5 -3.27,-0.45 ; -3.27,-4.5 -3.27,-0.45 ; -3.27,13.65 -3.27,17.7 ; -3.27,13.65 -3.27,17.7 ; -3.27,17.7 cw(c-2.471,17.701) -2.47,18.5 ; -3.27,17.7 cw(c-2.471,17.701) -2.47,18.5 ; -2.47,-5.3 2.47,-5.3 ; -2.47,-5.3 2.47,-5.3 ; -2.47,18.5 2.47,18.5 ; -2.47,18.5 2.47,18.5 ; 2.47,-5.3 ccw(c2.471,-4.501) 3.27,-4.5 ; 2.47,-5.3 ccw(c2.471,-4.501) 3.27,-4.5 ; 2.47,18.5 cw(c2.471,17.701) 3.27,17.7 ; 2.47,18.5 cw(c2.471,17.701) 3.27,17.7 ; 3.27,-4.5 3.27,-0.45 ; 3.27,-4.5 3.27,-0.45 ; 3.27,-0.45 cw(c4.27,-0.45) 5.27,-0.45 ; 3.27,-0.45 cw(c4.27,-0.45) 5.27,-0.45 ; 3.27,13.65 ccw(c4.27,13.65) 5.27,13.65 ; 3.27,13.65 ccw(c4.27,13.65) 5.27,13.65 ; 3.27,13.65 3.27,17.7 ; 3.27,13.65 3.27,17.7 ; 5.27,-0.9 ccw(c7.497,-0.9) 8.201,1.213 ; 5.27,-0.9 ccw(c7.497,-0.9) 8.201,1.213 ; 5.27,-0.9 5.27,-0.45 ; 5.27,-0.9 5.27,-0.45 ; 5.27,13.65 5.27,14.1 ; 5.27,13.65 5.27,14.1 ; 5.27,14.1 cw(c7.497,14.1) 8.201,11.987 ; 5.27,14.1 cw(c7.497,14.1) 8.201,11.987 ; 7.63,2.624 ccw(c-0.003,6.6) 7.63,10.576 ; 7.63,2.624 ccw(c8.517,2.162) 8.201,1.213 ; 7.63,2.624 ccw(c8.517,2.162) 8.201,1.213 ; 7.63,2.624 ccw(c-0.003,6.6) 7.63,10.576 ; 7.63,10.576 cw(c8.517,11.038) 8.201,11.987 ; 7.63,10.576 cw(c8.517,11.038) 8.201,11.987
Top Assy:
  lines w0.05: -8.209,1.218 ccw(c-8.525,2.167) -7.638,2.628 ; -8.209,1.218 ccw(c-7.503,-0.9) -5.27,-0.9 ; -8.209,1.218 ccw(c-8.525,2.167) -7.638,2.628 ; -8.209,1.218 ccw(c-7.503,-0.9) -5.27,-0.9 ; -8.209,11.982 cw(c-7.503,14.1) -5.27,14.1 ; -8.209,11.982 cw(c-8.525,11.033) -7.638,10.572 ; -8.209,11.982 cw(c-7.503,14.1) -5.27,14.1 ; -8.209,11.982 cw(c-8.525,11.033) -7.638,10.572 ; -7.638,2.628 cw(c-0.003,6.6) -7.638,10.572 ; -7.638,2.628 cw(c-0.003,6.6) -7.638,10.572 ; -5.27,-0.9 -5.27,-0.45 ; -5.27,-0.9 -5.27,-0.45 ; -5.27,-0.45 cw(c-4.27,-0.45) -3.27,-0.45 ; -5.27,-0.45 cw(c-4.27,-0.45) -3.27,-0.45 ; -5.27,13.65 ccw(c-4.27,13.65) -3.27,13.65 ; -5.27,13.65 ccw(c-4.27,13.65) -3.27,13.65 ; -5.27,13.65 -5.27,14.1 ; -5.27,13.65 -5.27,14.1 ; -3.27,-4.5 ccw(c-2.471,-4.501) -2.47,-5.3 ; -3.27,-4.5 ccw(c-2.471,-4.501) -2.47,-5.3 ; -3.27,-4.5 -3.27,-0.45 ; -3.27,-4.5 -3.27,-0.45 ; -3.27,13.65 -3.27,17.7 ; -3.27,13.65 -3.27,17.7 ; -3.27,17.7 cw(c-2.471,17.701) -2.47,18.5 ; -3.27,17.7 cw(c-2.471,17.701) -2.47,18.5 ; -2.47,-5.3 2.47,-5.3 ; -2.47,-5.3 2.47,-5.3 ; -2.47,18.5 2.47,18.5 ; -2.47,18.5 2.47,18.5 ; 2.47,-5.3 ccw(c2.471,-4.501) 3.27,-4.5 ; 2.47,-5.3 ccw(c2.471,-4.501) 3.27,-4.5 ; 2.47,18.5 cw(c2.471,17.701) 3.27,17.7 ; 2.47,18.5 cw(c2.471,17.701) 3.27,17.7 ; 3.27,-4.5 3.27,-0.45 ; 3.27,-4.5 3.27,-0.45 ; 3.27,-0.45 cw(c4.27,-0.45) 5.27,-0.45 ; 3.27,-0.45 cw(c4.27,-0.45) 5.27,-0.45 ; 3.27,13.65 ccw(c4.27,13.65) 5.27,13.65 ; 3.27,13.65 ccw(c4.27,13.65) 5.27,13.65 ; 3.27,13.65 3.27,17.7 ; 3.27,13.65 3.27,17.7 ; 5.27,-0.9 ccw(c7.497,-0.9) 8.201,1.213 ; 5.27,-0.9 ccw(c7.497,-0.9) 8.201,1.213 ; 5.27,-0.9 5.27,-0.45 ; 5.27,-0.9 5.27,-0.45 ; 5.27,13.65 5.27,14.1 ; 5.27,13.65 5.27,14.1 ; 5.27,14.1 cw(c7.497,14.1) 8.201,11.987 ; 5.27,14.1 cw(c7.497,14.1) 8.201,11.987 ; 7.63,2.624 ccw(c8.517,2.162) 8.201,1.213 ; 7.63,2.624 ccw(c-0.003,6.6) 7.63,10.576 ; 7.63,2.624 ccw(c8.517,2.162) 8.201,1.213 ; 7.63,2.624 ccw(c-0.003,6.6) 7.63,10.576 ; 7.63,10.576 cw(c8.517,11.038) 8.201,11.987 ; 7.63,10.576 cw(c8.517,11.038) 8.201,11.987
Bottom Assy:
  lines w0.05: -8.209,1.218 ccw(c-8.525,2.167) -7.638,2.628 ; -8.209,1.218 ccw(c-7.503,-0.9) -5.27,-0.9 ; -8.209,1.218 ccw(c-8.525,2.167) -7.638,2.628 ; -8.209,1.218 ccw(c-7.503,-0.9) -5.27,-0.9 ; -8.209,11.982 cw(c-7.503,14.1) -5.27,14.1 ; -8.209,11.982 cw(c-8.525,11.033) -7.638,10.572 ; -8.209,11.982 cw(c-7.503,14.1) -5.27,14.1 ; -8.209,11.982 cw(c-8.525,11.033) -7.638,10.572 ; -7.638,2.628 cw(c-0.003,6.6) -7.638,10.572 ; -7.638,2.628 cw(c-0.003,6.6) -7.638,10.572 ; -5.27,-0.9 -5.27,-0.45 ; -5.27,-0.9 -5.27,-0.45 ; -5.27,-0.45 cw(c-4.27,-0.45) -3.27,-0.45 ; -5.27,-0.45 cw(c-4.27,-0.45) -3.27,-0.45 ; -5.27,13.65 ccw(c-4.27,13.65) -3.27,13.65 ; -5.27,13.65 ccw(c-4.27,13.65) -3.27,13.65 ; -5.27,13.65 -5.27,14.1 ; -5.27,13.65 -5.27,14.1 ; -3.27,-4.5 ccw(c-2.471,-4.501) -2.47,-5.3 ; -3.27,-4.5 ccw(c-2.471,-4.501) -2.47,-5.3 ; -3.27,-4.5 -3.27,-0.45 ; -3.27,-4.5 -3.27,-0.45 ; -3.27,13.65 -3.27,17.7 ; -3.27,13.65 -3.27,17.7 ; -3.27,17.7 cw(c-2.471,17.701) -2.47,18.5 ; -3.27,17.7 cw(c-2.471,17.701) -2.47,18.5 ; -2.47,-5.3 2.47,-5.3 ; -2.47,-5.3 2.47,-5.3 ; -2.47,18.5 2.47,18.5 ; -2.47,18.5 2.47,18.5 ; 2.47,-5.3 ccw(c2.471,-4.501) 3.27,-4.5 ; 2.47,-5.3 ccw(c2.471,-4.501) 3.27,-4.5 ; 2.47,18.5 cw(c2.471,17.701) 3.27,17.7 ; 2.47,18.5 cw(c2.471,17.701) 3.27,17.7 ; 3.27,-4.5 3.27,-0.45 ; 3.27,-4.5 3.27,-0.45 ; 3.27,-0.45 cw(c4.27,-0.45) 5.27,-0.45 ; 3.27,-0.45 cw(c4.27,-0.45) 5.27,-0.45 ; 3.27,13.65 ccw(c4.27,13.65) 5.27,13.65 ; 3.27,13.65 ccw(c4.27,13.65) 5.27,13.65 ; 3.27,13.65 3.27,17.7 ; 3.27,13.65 3.27,17.7 ; 5.27,-0.9 ccw(c7.497,-0.9) 8.201,1.213 ; 5.27,-0.9 ccw(c7.497,-0.9) 8.201,1.213 ; 5.27,-0.9 5.27,-0.45 ; 5.27,-0.9 5.27,-0.45 ; 5.27,13.65 5.27,14.1 ; 5.27,13.65 5.27,14.1 ; 5.27,14.1 cw(c7.497,14.1) 8.201,11.987 ; 5.27,14.1 cw(c7.497,14.1) 8.201,11.987 ; 7.63,2.624 ccw(c8.517,2.162) 8.201,1.213 ; 7.63,2.624 ccw(c-0.003,6.6) 7.63,10.576 ; 7.63,2.624 ccw(c8.517,2.162) 8.201,1.213 ; 7.63,2.624 ccw(c-0.003,6.6) 7.63,10.576 ; 7.63,10.576 cw(c8.517,11.038) 8.201,11.987 ; 7.63,10.576 cw(c8.517,11.038) 8.201,11.987

## Dimensions
-7.5,14.1 to -7.5,-0.9 on Dimension
2.47,-5.3 to -2.47,18.5 on Dimension
-9.735,-0.9 to 9.725,-0.9 on Dimension
-8.609,6.6 to 8.604,6.6 on Dimension
-7.5,-0.9 to 7.5,-0.9 on Dimension
-3.27,-4.5 to 3.27,-4.5 on Dimension

## Text inside footprints (layer, text, board x,y; h text height)
J1: Mechanical 9 "Jacdac / cable connector  / body" at -4.821,22.658 h1.7
J2: Alignment "board outline  / for 'outie'" at -5.14,-0.314 h1.2 r180; Alignment "board outline  / for 'innie'" at -4.53,2.531 h1.2 r180; Mechanical 9 "Jacdac / cable connector  / body" at 4.821,-9.458 h1.7 r180
MH3: Assembly Notes "5mm dia keepout  / for traces and  / components to  / allow space for  / bushes/standoffs/ / nuts/screw heads" at -24.675,-6.65 h0.5; Assembly Notes "board outline can  / be on 2.0mm   / radius if necessary" at 13.45,-5.725 h0.5